# Altium PCB MAGI'sRTC.PcbDoc
Units mil, origin at the board's own origin, x right, y up, seen from the top; angles counter-clockwise.
Board outline 6000 x 4000 mil, 2 copper layers (Top Layer, Bottom Layer); 10 components, 9 nets, 63 pads, 7 vias.
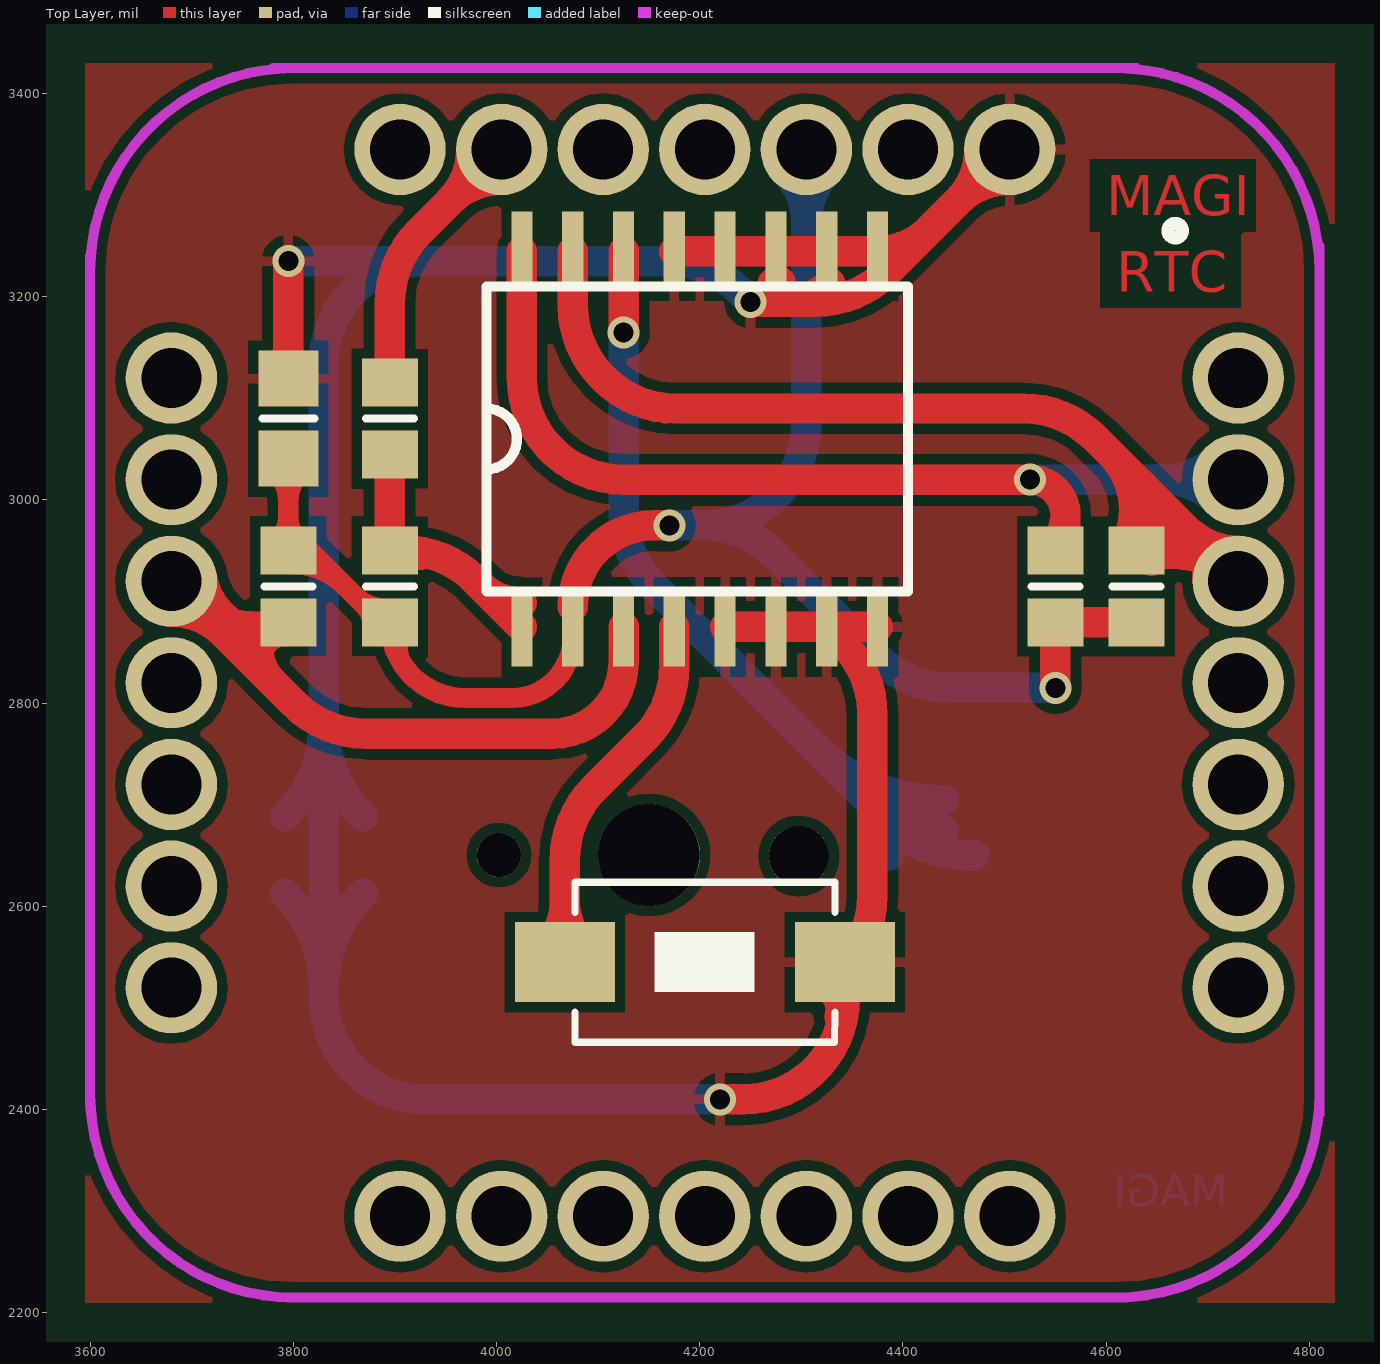
[diagram p0: Top Layer view]
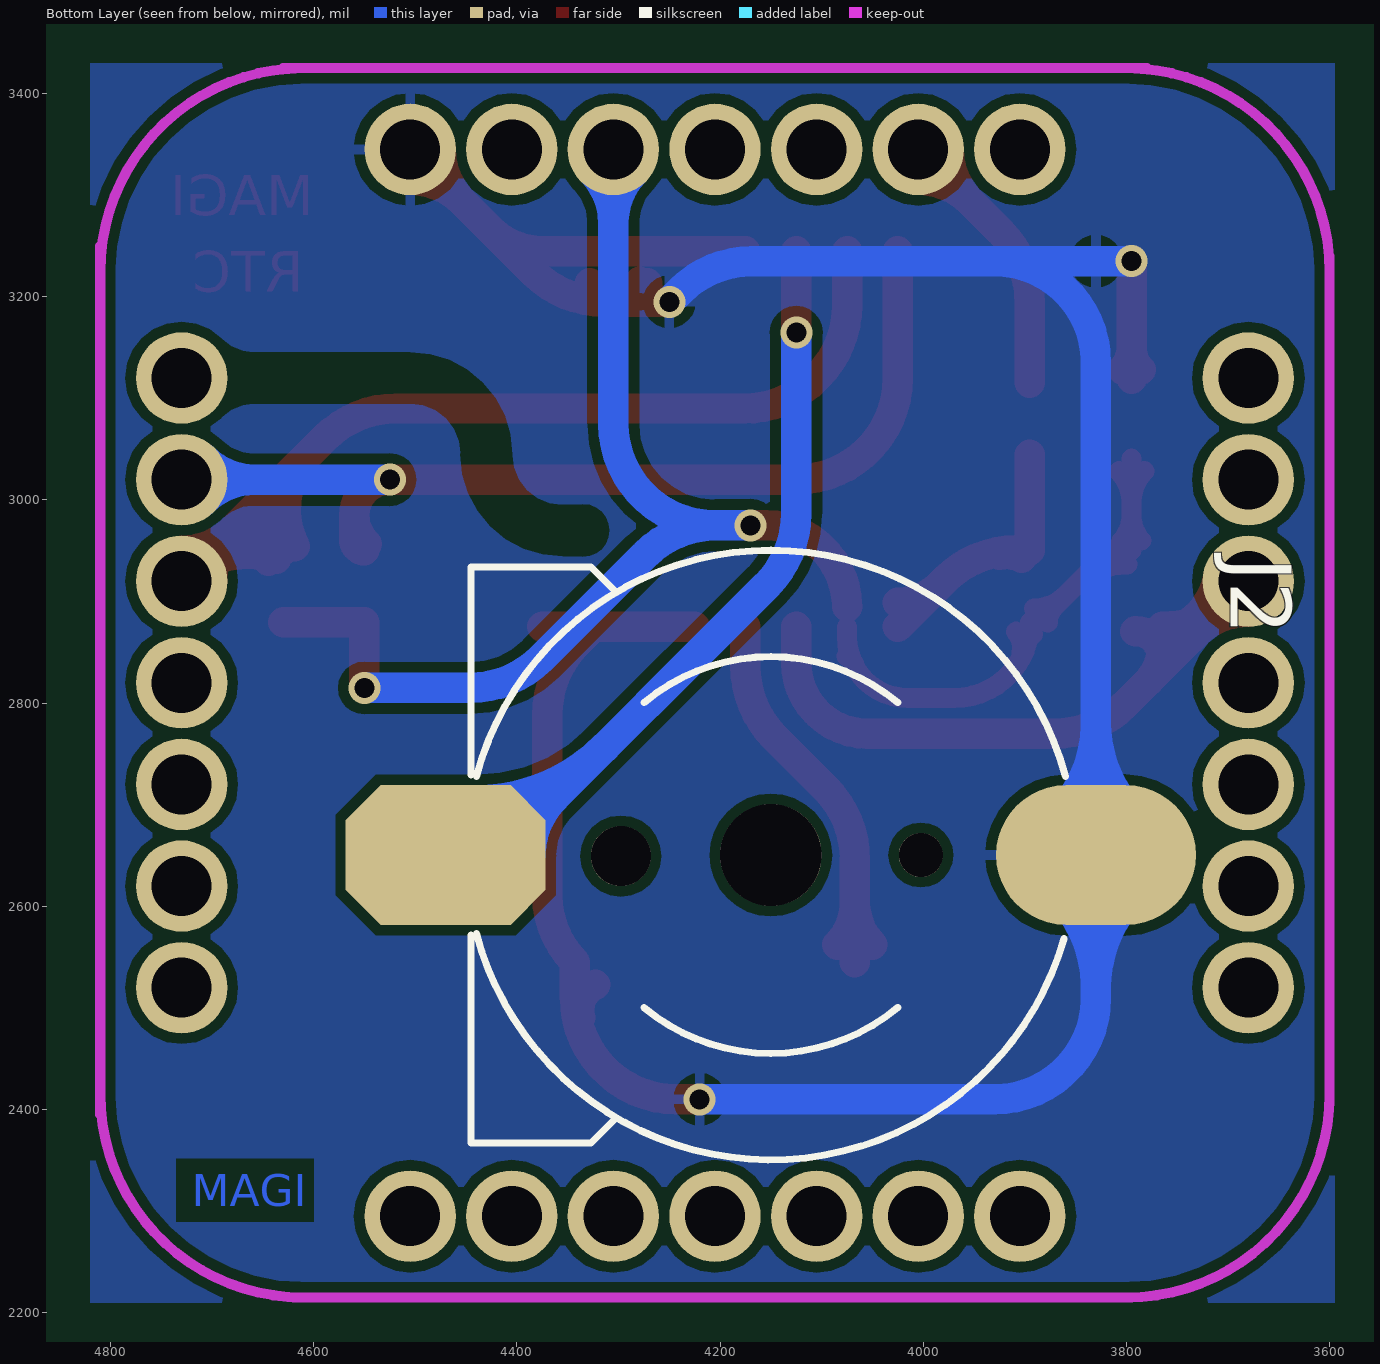
[diagram p1: Bottom Layer view, seen from below]

## Layer stack, top to bottom
Top Layer: signal copper 1.4
Dielectric: dielectric 12.6, FR-4, Dk 4.8
Bottom Layer: signal copper 1.4

## Board outline
1000,1000 7000,1000 7000,5000 1000,5000

## Design rules (kind name [scope] priority, off if disabled: settings)
Clearance [All] p1: gap=10
PolygonConnect [All] p1: connectstyle=Relief reliefconductorwidth=10 reliefentries=4 polygonreliefangle="90 Angle" airgapwidth=10
RoomDefinition MAGI'sRTC [InComponentClass('MAGI'sRTC')] p1: confinementstyle=ConfineIn formatcopy=TRUE lockcomponents=FALSE outline 0,0 2000,0 2000,1000 0,1000
RoutingVias [All] p1: holewidth=28 width=50 viastyle="Through Hole" minholewidth=28 minwidth=50 maxholewidth=28 maxwidth=50
SolderMaskExpansion [All] p1: expansion=4
Width [All] p1: maxlimit=100 minlimit=10 preferedwidth=30
28 further rules are at their usual default settings.

## Components (designator, comment, footprint, x,y, rotation, side; value= is the part's Value field where it differs from the comment)
C1 "CAP_1" 6-0805_M 3795,3080 r90 top
J1 "MAGI-M8" MAGI-M8 4205,2820 r0 top
J2 "CON2" CR1220 4150,2650 r270 bottom
J3 "CON2" SW-1-SMD 4205,2545 r90 top
R1 "RES1" 6-0805_N 3895,2915 r90 top
R2 "RES1" 6-0805_N 4550,2915 r270 top
R3 "RES1" 6-0805_N 4630,2915 r270 top
R4 "RES1" 6-0805_N 3795,2915 r270 top
R5 "RES1" 6-0805_N 3895,3080 r270 top
U1 "DS3231" DS3231 4200,3060 r90 top

## Footprints (in the part's own frame and the unit in brackets; to place one, negate y for a bottom-side part, rotate by r counter-clockwise, add the part's x,y. Pads: shape width x height; smd on the part's side, far side on the other; paste and mask are expansions set on the pad)
6-0805_M [mm] "Chip Resistor, Body 2.0x1.2mm, IPC Low Density"
  rect 1.4x1.5 smd: 1(-1,0) 2(1,0)
  silkscreen extent 0,-0.65 0,0.65, body extent -1.07,-0.7 1.07,0.7, height 0.7
6-0805_N [mm] "Chip Resistor, Body 2.0x1.2mm, IPC Medium Density"
  rect 1.2x1.4 smd: 1(-0.9,0) 2(0.9,0)
  silkscreen extent 0,-0.6 0,0.6, body extent -1.07,-0.7 1.07,0.7, height 0.7
CR1220 [mm]
  round 2.54 hole 2.54: 0(-0.012,0)
  round 1.1 hole 1.1: 0(-0.012,3.75)
  round 1.5 hole 1.5: 0(0.012,-3.75)
  oct 3.5x5 smd: 1(-0.012,-8.128)
  oval 3.5x5 smd: 2(-0.012,8.128)
  silkscreen extent -7.63,-7.5 7.61,7.36
DS3231 [mm]
  rect 1.98x0.53 smd: 1(-4.699,4.445) 2(-4.699,3.175) 3(-4.699,1.905) 4(-4.699,0.635) 5(-4.699,-0.635) 6(-4.699,-1.905) 7(-4.699,-3.175) 8(-4.699,-4.445) 9(4.699,-4.445) 10(4.699,-3.175) 11(4.699,-1.905) 12(4.699,-0.635) 13(4.699,0.635) 14(4.699,1.905) 15(4.699,3.175) 16(4.699,4.445)
  silkscreen extent -3.81,-5.21 3.81,5.33
MAGI-M8 [mil]
  round 90 hole 59.06: 1(300,525) 2(200,525) 3(100,525) 4(0,525) 5(-100,525) 6(-200,525) 7(-300,525) 8(-525,300) 9(-525,200) 10(-525,100) 11(-525,0) 12(-525,-100) 13(-525,-200) 14(-525,-300) 15(-300,-525) 16(-200,-525) 17(-100,-525) 18(0,-525) 19(100,-525) 20(200,-525) 21(300,-525) 22(525,-300) 23(525,-200) 24(525,-100) 25(525,0) 26(525,100) 27(525,200) 28(525,300)
  Keep-Out Layer lines w10: -605,-415 -605,290 -605,420 ; -605,-405 ccw(c-405,-405) -405,-605 ; -605,405 cw(c-405,405) -405,605 ; -425,605 425,605 ; -410,-605 415,-605 ; 405,-605 ccw(c405,-405) 605,-405 ; 405,605 cw(c405,405) 605,405 ; 605,-425 605,430
SW-1-SMD [mm]
  rect 2x2.5 smd: 1(0,3.5) 2(0,-3.5)
  silkscreen extent -2,-3.25 2,3.25

## Part data
C1: "Capacitor"
J2 J3: "Connector"

## Via types
v1: diameter 31.5, hole 19.68, Top Layer to Bottom Layer, 7 vias

## Nets (pads, with @x,y where several pads share a name; then routed paths per layer and width w, separated by ;. In a path a pad name is that pad's centre, name@x,y a point inside that pad or via, vN(x,y) a via of type N, cw(c..) or ccw(c..) an arc to the next point about the centre after c; other vN are vias at no path point)
32KHZ: R1.2 R5.2 U1.1 | length 319.3
  Top Layer w30: R5.2 R1.2 3908.15,2950.43 cw(c3908.15,2850.43) 3978.86,2921.14 U1.1 ; R1.2@3903.25,2942.97 cw(c3917.72,2917.89) 3925.22,2945.86 ; 3984.07,2915.93 ccw(c4025,2956.86) U1.1@4025,2898.98
GND: C1.2 J1.1 J2.2 J3.2 U1.5 U1.6 U1.7 U1.8 U1.9 U1.10 U1.11 U1.12 U1.13 | length 3839.9
  Top Layer w30: C1.2@3786.12,3128.25 ccw(c3764.68,3149.69) 3795,3149.69 ccw(c3825.32,3149.69) C1.2@3803.88,3128.25 ; C1.2 v1(3795,3235) ; U1.13 U1.12 U1.11 U1.10 U1.9 ccw(c4375,3317.43) 4426.15,3266.15 ; v1(4220,2410) 4242.8,2410 ccw(c4242.8,2510) 4342.8,2510 J3.2 ccw(c4277.12,2610.68) 4370,2610.68 4370,2788.58 ccw(c4270,2788.58) 4340.71,2859.29 U1.7 ; U1.5 U1.6 U1.7 ; U1.11@4271.64,3213.36 ccw(c4313.58,3252.07) 4313.58,3195 ; U1.11@4279.24,3214.75 cw(c4250,3226.51) v1(4250,3195) 4313.58,3195 ; 4284.22,3195 ccw(c4284.22,3257.23) U1.10@4328.23,3213.23 ; J3.2@4322.78,2522.85 cw(c4311.42,2498.11) 4337.72,2491.06 ; U1.8 U1.7 ; J1.1@4475,3345 cw(c4402.57,3345) 4453.79,3293.79 cw(c4505,3242.57) J1.1@4505,3315 ; J1.1 4426.15,3266.15 ; 4313.58,3195 ccw(c4313.58,3295) 4384.29,3224.29 4426.15,3266.15
  Bottom Layer w30: J2.2@3791.89,2612.38 cw(c3699.88,2520.37) 3830,2520.37 cw(c3960.12,2520.37) J2.2@3868.11,2612.38 ; J2.2@3791.89,2688.6 ccw(c3699.88,2780.61) 3830,2780.61 ccw(c3960.12,2780.61) J2.2@3868.11,2688.6 ; v1(3795,3235) 3930,3235 ; v1(4220,2410) 3930,2410 cw(c3930,2510) 3830,2510 J2.2 3830,3135 cw(c3930,3135) 3930,3235 ; v1(4250,3195) 4239.29,3205.71 ccw(c4168.58,3135) 4168.58,3235 3930,3235
INT0: J1.10 R4.2 U1.3 | length 968.8
  Top Layer w30: J1.10@3680,2890 cw(c3680,2817.57) 3731.21,2868.79 cw(c3782.43,2920) J1.10@3710,2920 ; J1.10 J1.10@3696.72,2903.28 ; J1.10@3687.76,2891.02 cw(c3701.1,2841.24) 3726.87,2885.87 ; J1.10@3709.6,2924.88 ccw(c3777.44,2936.07) 3743.06,2876.53 ; 3765,2844.57 cw(c3791.37,2844.57) R4.2@3791.14,2870.95 ; 3780,2820 3800.71,2799.29 ccw(c3871.42,2870) 3871.42,2770 4055,2770 ccw(c4055,2840) 4125,2840 U1.3 ; J1.10@3696.72,2903.28 ccw(c3765,2971.57) 3765,2875 3765,2856.21 ccw(c3816.21,2856.21) 3779.97,2820.03 J1.10@3696.72,2903.28
NetJ1_6: J1.6 R5.1 | length 384.6
  Top Layer w30: R5.1 3895,3193.58 cw(c3995,3193.58) 3924.29,3264.29 J1.6 ; J1.6@3975,3345 cw(c3902.57,3345) 3953.79,3293.79 cw(c4005,3242.57) J1.6@4005,3315
NetJ2_1: J2.1 U1.14 | length 1047.8
  Top Layer w30: v1(4125,3165) U1.14
  Bottom Layer w30: v1(4125,3165) 4125,2986.42 ccw(c4225,2986.42) 4154.29,2915.71 4390.22,2679.78 ccw(c4460.93,2750.49) 4460.93,2650.49 J2.1 ; 4312.68,2757.32 ccw(c4440.47,2885.12) J2.1@4440.47,2704.39 ; 4363.29,2706.71 cw(c4307.07,2650.49) J2.1@4386.57,2650.49 ; 4363.89,2706.11 ccw(c4440.47,2782.7) J2.1@4440.47,2674.39
RST: J3.1 U1.4 | length 458.5
  Top Layer w30: J3.1@4049.97,2562.23 ccw(c4008.37,2603.83) 4067.2,2603.83 ccw(c4126.04,2603.83) J3.1@4084.44,2562.23 ; J3.1 4067.2,2645.78 cw(c4167.2,2645.78) 4096.49,2716.49 4145.71,2765.71 ccw(c4075,2836.42) 4175,2836.42 U1.4
SCL: J1.27 R2.1 U1.16 | length 1127.8
  Top Layer w30: U1.16 4025,3120 ccw(c4125,3120) 4125,3020 v1(4525,3020) cw(c4525,2985) 4560,2985 ; R2.1@4547.95,2956.64 ccw(c4520.6,2985) 4560,2985 ; R2.1 ccw(c4550,2960.43) 4560,2960.43 4560,2985
  Bottom Layer w30: v1(4525,3020) J1.27 ; J1.27@4708.79,2998.79 ccw(c4657.57,2947.57) 4657.57,3020 ccw(c4657.57,3092.43) J1.27@4708.79,3041.21
SDA: J1.26 R3.1 U1.15 | length 1402.6
  Top Layer w30: U1.15 4075,3191.42 ccw(c4175,3191.42) 4104.29,3120.71 4105.71,3119.29 ccw(c4176.42,3190) 4176.42,3090 4518.58,3090 cw(c4518.58,2990) 4589.29,3060.71 4605,3045 ; R3.1@4618.46,2954.49 ccw(c4550.67,2990.67) 4605,3045 ; R3.1@4627.26,2970.74 cw(c4648.17,2907.14) 4695.52,2954.48 ; R3.1 4630,2984.64 ccw(c4544.64,2984.64) 4605,3045 ; 4633.62,3016.38 cw(c4588,2970.75) R3.1@4644.92,2940.37 ; R3.1@4636.63,2942.24 cw(c4665.24,2855.25) J1.26 4605,3045 ; J1.26@4700,2920 ccw(c4627.57,2920) 4678.79,2971.21 ccw(c4730,3022.43) J1.26@4730,2950
VCC: C1.1 J1.3 R1.1 R2.2 R3.2 R4.1 U1.2 | length 2031.3
  Top Layer w20: C1.1@3782.58,3028.21 cw(c3752.61,2998.24) 3795,2998.24 cw(c3837.39,2998.24) C1.1@3807.42,3028.21 ; R4.1@3785.37,2960.07 ccw(c3762.11,2983.32) 3795,2983.32 ccw(c3827.89,2983.32) R4.1@3804.63,2960.07 ; C1.1 R4.1 3815.53,2950.43 3886.4,2879.57 R1.1 ccw(c3969.57,2879.57) 3969.57,2805 4015,2805 ccw(c4015,2865) 4075,2865 U1.2 ; R4.1@3798.94,2936.81 cw(c3798.94,2863.85) 3850.52,2915.44 ; 3859.85,2906.12 ccw(c3891.06,2937.33) R1.1@3891.06,2893.19 ; R1.1@3871.11,2894.86 cw(c3855.81,2879.57) R1.1@3877.44,2879.57 ; R1.1@3892.13,2867.77 cw(c3882.17,2850.53) 3901.4,2855.69 ; 3903.28,2848.65 cw(c3925.16,2854.51) R1.1@3908.79,2870.16 ; 4067.09,2835.5 cw(c4083.93,2830.99) U1.2@4075.22,2846.08
  Top Layer w30: U1.2@4075,2895 cw(c4155,2895) 4155,2975 v1(4170,2975) ; v1(4550,2815) R2.2 R3.2
  Bottom Layer w30: v1(4170,2975) 4203.58,2975 ; J1.3@4283.79,3323.79 cw(c4232.57,3272.57) 4305,3272.57 cw(c4377.43,3272.57) J1.3@4326.21,3323.79 ; J1.3 4305,3075 cw(c4205,3075) 4205,2975 4203.58,2975 ; v1(4550,2815) 4446.42,2815 cw(c4446.42,2915) 4375.71,2844.29 4274.29,2945.71 ccw(c4203.58,2875) 4203.58,2975
pads on no net: J1.2 J1.4 J1.5 J1.7 J1.8 J1.9 J1.11 J1.12 J1.13 J1.14 J1.15 J1.16 J1.17 J1.18 J1.19 J1.20 J1.21 J1.22 J1.23 J1.24 J1.25 J1.28 J2.0

## Polygon pours and split planes (outlines as drawn)
GND on Bottom Layer "Top Layer-No Net" (solid, pour order 3): 3595,3430 3595,2210 4820,2210 4820,3430
GND on Top Layer "Keep-Out Layer-No Net" (solid, pour order 4): 3595,3430 3595,2210 4825,2210 4825,3425 4825,3430

## Other copper
Top Layer:
  text "MAGI" at 4600,3280 h39.37
  text "RTC" at 4610,3205 h40
Bottom Layer:
  text "MAGI" at 4720,2305 h31.5

## Silkscreen, mask and mechanical layers (free items; w line width, h text height)
Top Overlay:
  circle w13: c4667.93,3265 r7.07